# Altium PCB FinalGateWay.PcbDoc
Units mm, origin at the board's own origin, x right, y up, seen from the top; angles counter-clockwise.
Board outline 157.1 x 53.85 mm, 2 copper layers (Top Layer, Bottom Layer); 5 components, 11 nets, 73 pads, 4 vias.
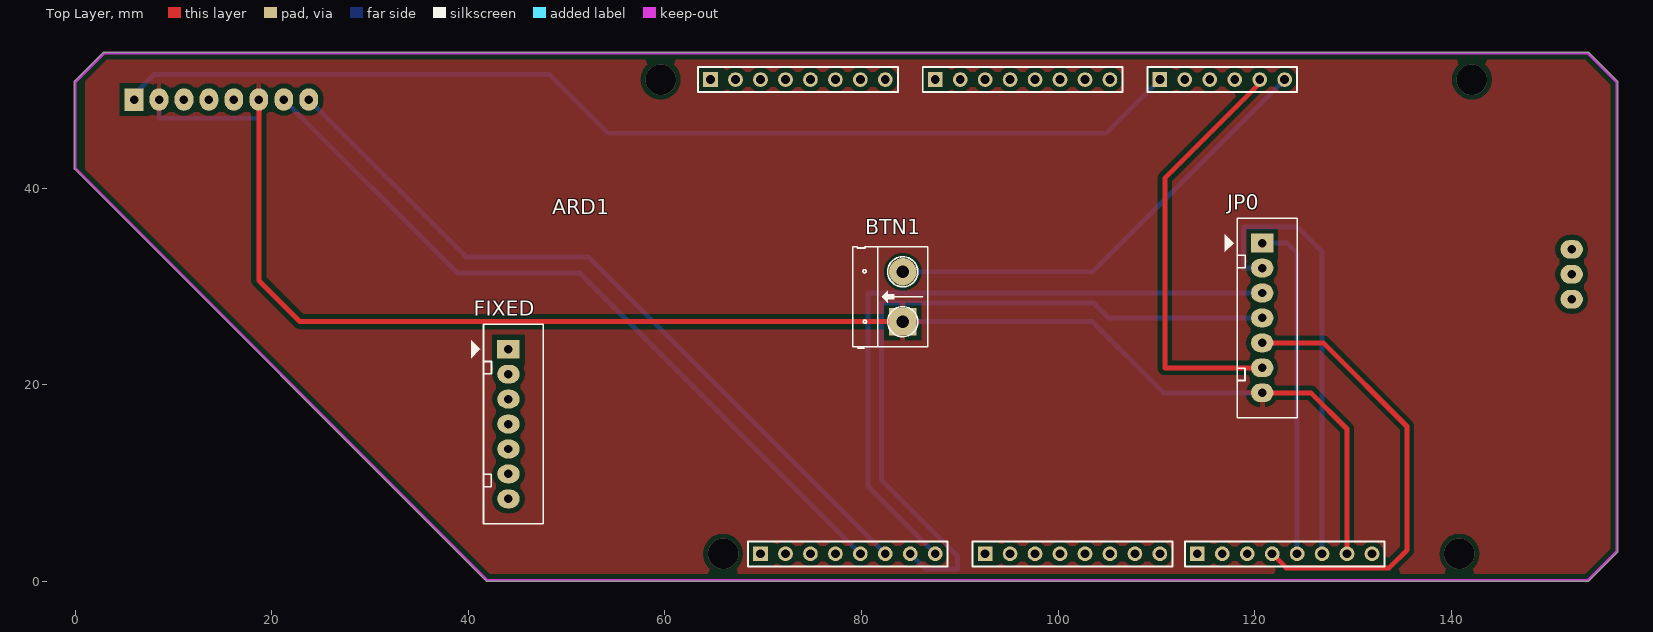
[diagram p0: Top Layer view]
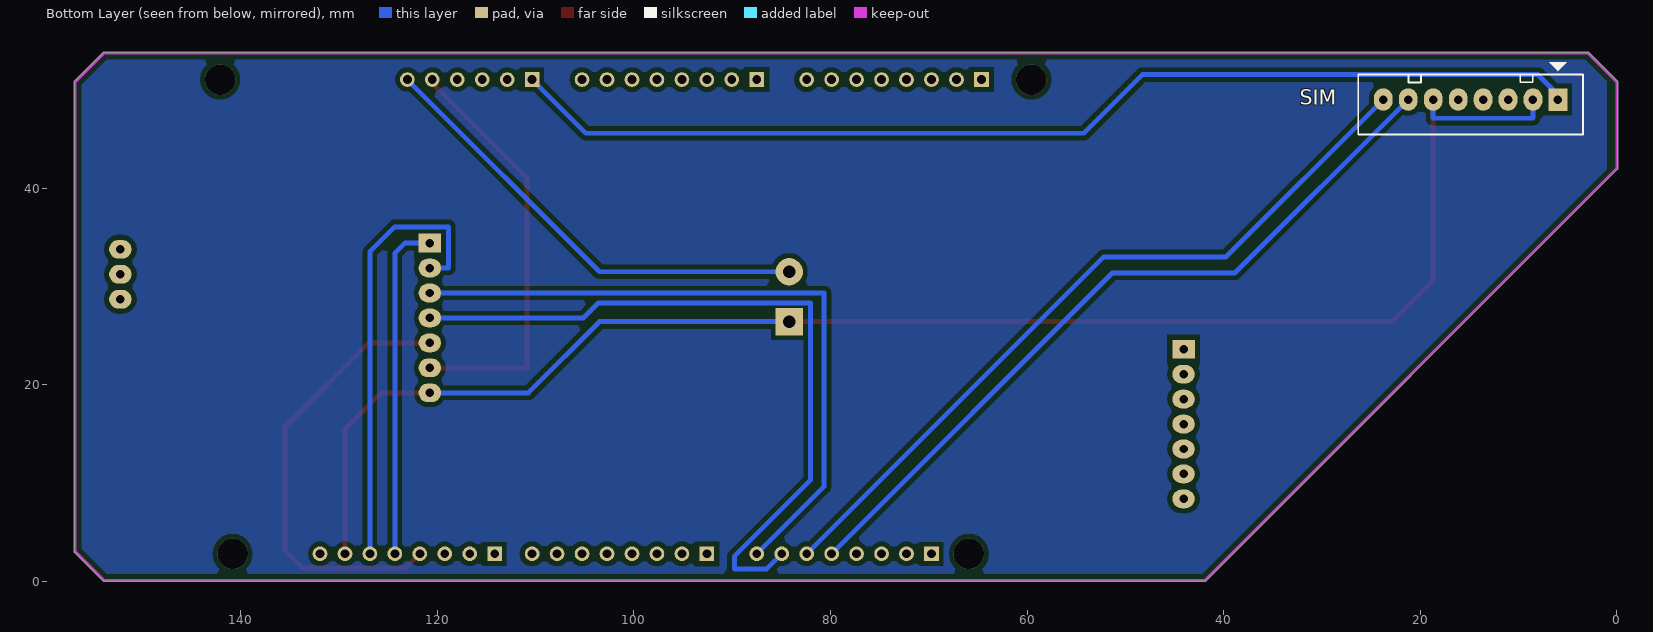
[diagram p1: Bottom Layer view, seen from below]

## Layer stack, top to bottom
Top Solder: solder mask 0.0102, Solder Resist, Dk 3.5
Top Layer: signal copper 0.0356
Dielectric 1: dielectric 0.32, FR-4, Dk 4.8
Bottom Layer: signal copper 0.0356
Bottom Solder: solder mask 0.0102, Solder Resist, Dk 3.5

## Board outline
-0.09,41.946 cw(c0,42.037) -0.127,42.037 -0.127,50.8 cw(c0,50.8) -0.09,50.891 -0.09,50.89 2.831,53.811 2.83,53.811 cw(c2.921,53.721) 2.921,53.848 153.924,53.848 cw(c153.924,53.721) 154.015,53.811 154.014,53.811 156.935,50.89 156.935,50.891 cw(c156.845,50.8) 156.972,50.8 156.972,3.048 cw(c156.845,3.048) 156.935,2.957 156.935,2.958 154.014,0.037 154.015,0.037 cw(c153.924,0.127) 153.924,0 41.91,0 cw(c41.91,0.127) 41.819,0.037 41.82,0.037

## Design rules (kind name [scope] priority, off if disabled: settings)
Clearance [All] p1: gap=0.254 except(0.5: Arc-Poly Track-Poly SMDPad-Poly THPad-Poly Via-Poly Fill-Poly Poly-Poly Poly-Region Poly-Text)
DiffPairsRouting [All] p1: maxlimit=0.5 minlimit=0.5 mostfreqgap=0.5 toplayer_minwidth=0.5 toplayer_maxwidth=0.5 toplayer_prefwidth=0 bottomlayer_minwidth=0.5 bottomlayer_maxwidth=0.5 bottomlayer_prefwidth=0 maxuncoupledlength=12.7
PlaneClearance [All] p1: clearance=0.5
PlaneConnect [All] p1: planeconnectstyle=Relief reliefexpansion=0.5 reliefentries=4 reliefconductorwidth=0.5 reliefairgap=0.5
PolygonConnect [All] p1: connectstyle=Relief reliefconductorwidth=0.5 reliefentries=4 polygonreliefangle="90 Angle" airgapwidth=0.5
RoutingVias [All] p1: holewidth=3 width=3 viastyle="Through Hole" minholewidth=1.27 minwidth=1.27 maxholewidth=5 maxwidth=5
SolderMaskExpansion [All] p1: expansion=0.5
Width [All] p1: maxlimit=3 minlimit=0.254 preferedwidth=0.5
27 further rules are at their usual default settings.

## Classes and differential pairs
component class GateWayMainBoard: ARD1 BTN1 SIM

## Components (designator, comment, footprint, x,y, rotation, side; value= is the part's Value field where it differs from the comment)
ARD1 "ARDUINO MEGA" Arduino 102.743,25.654 r180 top
BTN1 "Reset Button" HED2 84.201,26.416 r90 top
FIXED "LORA" CON7 44.069,23.622 r270 top (schematic designator JP0)
JP0 "LORA" CON7 120.777,34.417 r270 top
SIM "SIM" CON8 5.969,49.022 r0 bottom (schematic designator JP1)

## Footprints (in the part's own frame and the unit in brackets; to place one, negate y for a bottom-side part, rotate by r counter-clockwise, add the part's x,y. Pads: shape width x height; smd on the part's side, far side on the other; paste and mask are expansions set on the pad)
Arduino [mm] "Arduino Mega 2560"
  rect 1.5x1.5 hole 0.9: 0(10.16,22.86) 8(-11.43,22.86) 21(33.02,22.86) 59(-7.62,-25.4) 67(15.24,-25.4) 75(38.1,-25.4)
  round 1.5 hole 0.9: 1(7.62,22.86) 2(5.08,22.86) 3(2.54,22.86) 4(0,22.86) 5(-2.54,22.86) 6(-5.08,22.86) 7(-7.62,22.86) 9(-13.97,22.86) 10(-16.51,22.86) 11(-19.05,22.86) 12(-21.59,22.86) 13(-24.13,22.86) 14(15.24,22.86) 15(17.78,22.86) 16(20.32,22.86) 17(22.86,22.86) 18(25.4,22.86) 19(27.94,22.86) 20(30.48,22.86) 54(-20.32,-25.4) 55(-17.78,-25.4) 56(-15.24,-25.4) 57(-12.7,-25.4) 58(-10.16,-25.4) 60(-2.54,-25.4) 61(0,-25.4) 62(2.54,-25.4) 63(5.08,-25.4) 64(7.62,-25.4) 65(10.16,-25.4) 66(12.7,-25.4) 68(20.32,-25.4) 69(22.86,-25.4) 70(25.4,-25.4) 71(27.94,-25.4) 72(30.48,-25.4) 73(33.02,-25.4) 74(35.56,-25.4) 76(-26.67,22.86) 77(-29.21,22.86)
  silkscreen extent -30.48,-26.67 39.37,24.13
CON7 [mil] "CON7"
  rect 75x90 hole 34: 1(0,0)
  oval 75x90 hole 34: 2(100,0) 3(200,0) 4(300,0) 5(400,0) 6(500,0) 7(600,0)
  silkscreen extent -100,-150 700,140
CON8 [mil] "CON8"
  rect 75x90 hole 34: 1(0,0)
  oval 75x90 hole 34: 2(100,0) 3(200,0) 4(300,0) 5(400,0) 6(500,0) 7(600,0) 8(700,0)
  silkscreen extent -100,-150 800,140
HED2 [mil] "Header 2, 2 pin, hight 300mil, Pin to Pin 200, Colour Green"
  rect 110x110 hole 50: 1(0,0)
  round 110 hole 50: 2(200,0)
  silkscreen extent -106,-100 300,200, body extent -92,-140 302,155, height 394

## Part data
ARD1: library part Arduino
BTN1: library part Hed2, "Header 2 (Green)"
FIXED JP0: library part Con7, "Connector 7"
SIM: library part Con8, "Connector 8"

## Free pads (board coordinates)
  oval 2.286x1.905 hole 0.864: ""(152.273,28.702) ""(152.273,31.242) ""(152.273,33.782)

## Via types
v1: diameter 3.1, hole 3.1, Top Layer to Bottom Layer, 4 vias

## Nets (pads, with @x,y where several pads share a name; then routed paths per layer and width w, separated by ;. In a path a pad name is that pad's centre, name@x,y a point inside that pad or via, vN(x,y) a via of type N, cw(c..) or ccw(c..) an arc to the next point about the centre after c; other vN are vias at no path point)
D11-AUX: ARD1.11 JP0.5 | length 45.9
  Top Layer w0.5: JP0.5 127,24.257 135.509,15.748 135.509,3.175 133.706,1.372 123.215,1.372 ARD1.11
D12-M0: ARD1.12 JP0.1 | length 34.6
  Bottom Layer w0.5: JP0.1 123.317,34.417 124.333,33.401 ARD1.12
D13-M1: ARD1.13 JP0.2 | length 45.9
  Bottom Layer w0.5: JP0.2 118.872,31.877 118.872,36.068 124.333,36.068 126.873,33.528 ARD1.13
GND: ARD1.76 BTN1.1 JP0.7 SIM.2 SIM.6 | length 162.1
  Top Layer w0.5: SIM.6 18.669,30.607 22.86,26.416 BTN1.1 ; JP0.7 125.73,19.177 129.413,15.494 ARD1.76
  Bottom Layer w0.5: SIM.2 8.509,47.117 18.669,47.117 SIM.6 ; BTN1.1 103.505,26.416 110.744,19.177 JP0.7
NetARD1_54: ARD1.54 BTN1.2 | length 47
  Bottom Layer w0.5: BTN1.2 103.505,31.496 ARD1.54
NetARD1_55: ARD1.55 JP0.6 | length 43.2
  Top Layer w0.5: ARD1.55 120.523,50.673 110.871,41.021 110.871,21.717 JP0.6
RX2-RX_SIM: ARD1.17 SIM.7 | length 77.9
  Bottom Layer w0.5: SIM.7@21.285,49.022 SIM.7 38.862,31.369 51.308,31.369 ARD1.17
RX3-TX_LORA: ARD1.15 JP0.4 | length 75.1
  Bottom Layer w0.5: ARD1.15 86.487,1.27 89.789,1.27 89.789,2.54 82.042,10.287 82.042,28.317 103.636,28.317 105.156,26.797 JP0.4
TX2-TX_SIM: ARD1.16 SIM.8 | length 77.8
  Bottom Layer w0.5: SIM.8 39.751,33.02 52.197,33.02 ARD1.16
TX3-RX_LORA: ARD1.14 JP0.3 | length 69.5
  Bottom Layer w0.5: ARD1.14 80.645,9.652 80.645,29.337 JP0.3
VCC: ARD1.59 SIM.1 | length 110.5
  Bottom Layer w0.5: SIM.1 5.969,49.53 8.001,51.562 48.26,51.562 54.229,45.593 104.902,45.593 ARD1.59
pads on no net: ARD1.0 ARD1.1 ARD1.2 ARD1.3 ARD1.4 ARD1.5 ARD1.6 ARD1.7 ARD1.8 ARD1.9 ARD1.10 ARD1.18 ARD1.19 ARD1.20 ARD1.21 ARD1.56 ARD1.57 ARD1.58 ARD1.60 ARD1.61 ARD1.62 ARD1.63 ARD1.64 ARD1.65 ARD1.66 ARD1.67 ARD1.68 ARD1.69 ARD1.70 ARD1.71 ARD1.72 ARD1.73 ARD1.74 ARD1.75 ARD1.77 FIXED.1 FIXED.2 FIXED.3 FIXED.4 FIXED.5 FIXED.6 FIXED.7 SIM.3 SIM.4 SIM.5
copper on no net:
  other v1: 65.913,2.794 140.843,2.794 59.563,51.054 142.113,51.054

## Polygon pours and split planes (outlines as drawn)
GND on Top Layer "TOP" (solid, pour order 2): 1.016,51.816 2.921,53.721 153.924,53.721 156.845,50.8 156.845,3.048 153.924,0.127 41.91,0.127 1.016,41.021
no net on Bottom Layer "TOP" (solid, pour order 4): 1.016,51.816 2.921,53.721 153.924,53.721 156.845,50.8 156.845,3.048 153.924,0.127 41.91,0.127 1.016,41.021

## Keep-outs
Keep-Out Layer:
  lines w0.254: 0,42.037 0,50.8 2.921,53.721 153.924,53.721 156.845,50.8 156.845,3.048 153.924,0.127 41.91,0.127 0,42.037